# Altium PCB PCB.PcbDoc (part 2 of 2)
Units mil, origin at the board's own origin, x right, y up, seen from the top; angles counter-clockwise.
Board outline 6000 x 4000 mil, 2 copper layers (Top Layer, Bottom Layer); 149 components, 246 nets, 514 pads, 0 vias.
Unrouted connection lines stored in the file: 218.
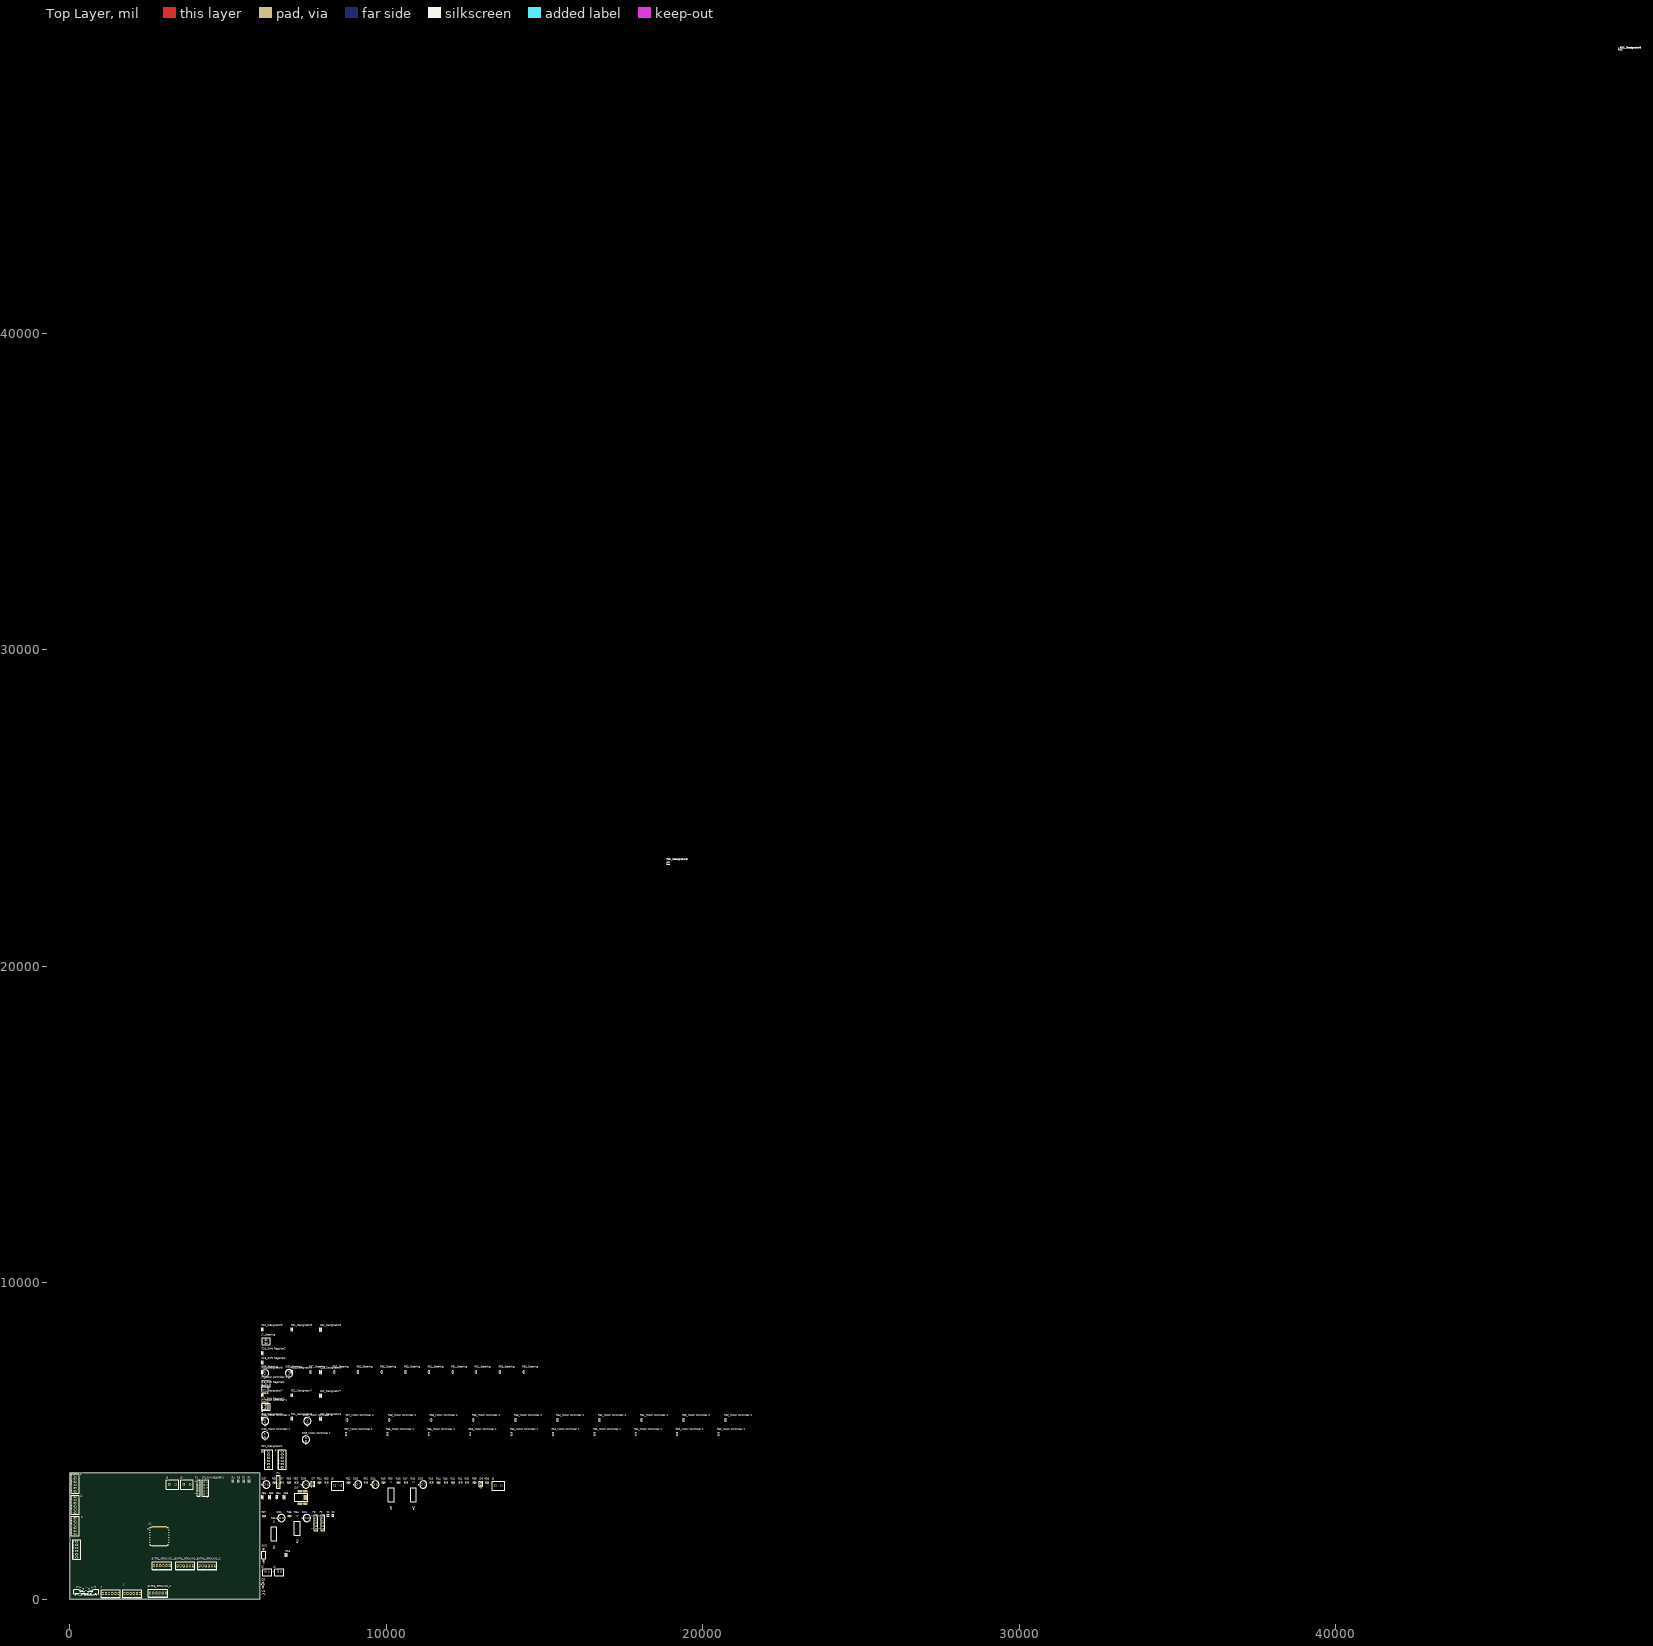
[diagram p0: Top Layer view]

## Nets (pads, with @x,y where several pads share a name; then routed paths per layer and width w, separated by ;. In a path a pad name is that pad's centre, name@x,y a point inside that pad or via, vN(x,y) a via of type N, cw(c..) or ccw(c..) an arc to the next point about the centre after c; other vN are vias at no path point)
5-3_1: U1.29
5-3_2: U1.30
5-3_3: U1.31
5-3_4: U1.32
5-3_5: U1.33
5-3_6: U1.34
5V_CLOCK: "U3_Shift Register1.11" U1.1
5V_DATA: "U3_Shift Register1.14" U1.5
5V_FAULT: R18.1 U1.80
5V_LATCH: "U3_Shift Register1.12" U1.3
12-3_1: U1.15
12-3_2: U1.16
12-3_3: U1.36
12-3_4: U1.18
12-3_5: U1.26
12-3_6: U1.25
12V_CLOCK: "U3_Shift Register2.11" U1.78
12V_DATA: "U3_Shift Register2.14" U1.35
12V_LATCH: "U3_Shift Register2.12" U1.77
AC_CS: U1.82 U5.5
AC_INT: U1.79 U5.6
AC_SCL: U1.84 U5.2
AC_SDI: U1.54 U5.3
AC_SDO: U1.17 U5.4
BOOT: 
BOOT0: 
BOOT1: 
CAN1_N: J3.1 J3.2 J4.1 J4.2
CAN1_RX: U1.70
CAN1_STBY: U1.69
CAN1_TX: U1.71
CAN2_RX: U1.51
CAN2_STBY: U1.53
CAN2_TX: U1.52
COMP: 
EX_PIN_1: 5.1 U1.67
EX_PIN_2: P3.5 U1.81
EX_PIN_3: P3.4 U1.83
EX_PIN_4: P3.3 U1.85
EX_PIN_5: P3.2 U1.60
EX_PIN_6: P3.1 U1.97
EX_PIN_7: P2.5 U1.98
EX_PIN_8: P2.4 U1.2
EX_PIN_9: P2.3 U1.4
EX_PIN_10: P2.2 U1.40
EX_PIN_11: P2.1 U1.41
GND: 1.1 1.2 1.3 1.4 1.5 1.6 2.1 2.2 2.3 2.4 2.5 2.6 "C18_Shift Register1.2" "C18_Shift Register2.2" "DS8_Motor Controller 1.2" "DS8_Motor Controller 2.2" "DS9_Motor Controller 1.2" "DS9_Motor Controller 2.2" "J7_Motor Controller 1.2" "J7_Motor Controller 2.2" "U3_Shift Register1.8" "U3_Shift Register1.13" "U3_Shift Register2.8" "U3_Shift Register2.13" C1.2 C2.2 C22_Designator1.2 C22_Designator2.2 C22_Designator3.2 C22_Designator4.2 C22_Designator5.2 C22_Designator6.2 C22_Designator7.2 C22_Designator8.2 C22_Designator9.2 C53.2 C54.1 C55.1 C56.1 D5.2 D6.2 D7.2 DS1.2 DS2.2 DS3.2 DS4.2 DS5.2 DS6.2 DS7.2 DS8_Steering.2 DS9_Steering.2 EXTRA_GROUND_1.1 EXTRA_GROUND_1.2 EXTRA_GROUND_1.3 EXTRA_GROUND_1.4 EXTRA_GROUND_1.5 EXTRA_GROUND_1.6 EXTRA_GROUND_2.1 EXTRA_GROUND_2.2 EXTRA_GROUND_2.3 EXTRA_GROUND_2.4 EXTRA_GROUND_2.5 EXTRA_GROUND_2.6 EXTRA_GROUND_3.1 EXTRA_GROUND_3.2 EXTRA_GROUND_3.3 EXTRA_GROUND_3.4 EXTRA_GROUND_3.5 EXTRA_GROUND_3.6 EXTRA_GROUND_4.1 EXTRA_GROUND_4.2 EXTRA_GROUND_4.3 EXTRA_GROUND_4.4 EXTRA_GROUND_4.5 EXTRA_GROUND_4.6 J5.1 J6.1 J7_Steering.2 J10.5 J10.6 J10.7 J10.8 J10.9 P1.5 P4.1 R31_Designator1.1 R31_Designator2.1 R31_Designator3.1 R31_Designator4.1 R31_Designator5.1 R31_Designator6.1 STLINK-HEADER-1.3 STLINK-HEADER-1.8 SW1.2 U1.10 U1.20 U1.27 U1.49 U1.74 U1.99 U5.8 U5.13
MC1_ENABLE: U1.44
MC2_ENABLE: U1.45
Net3_1: 3.1
Net3_2: 3.2
Net3_3: 3.3
Net3_4: 3.4
Net3_5: 3.5
Net3_6: 3.6
Net4_1: 4.1
Net4_2: 4.2
Net4_3: 4.3
Net4_4: 4.4
Net4_5: 4.5
Net4_6: 4.6
Net5_2: 5.2 U1.9
Net5_3: 5.3 U1.8
Net5_4: 5.4 U1.7
Net5_5: 5.5 U1.64
Net5_6: 5.6 U1.63
Net6_1: 6.1 U1.88
Net6_2: 6.2 U1.55
Net6_3: 6.3 U1.56
Net6_4: 6.4 U1.57
Net6_5: 6.5 U1.58
Net6_6: 6.6 U1.59
Net12_LOAD_SWITCH_Designator1_2: "U3_Shift Register2.5"
Net12_LOAD_SWITCH_Designator1_5: R22_Designator1.2
Net12_LOAD_SWITCH_Designator1_6: R21_Designator1.1
Net12_LOAD_SWITCH_Designator1_7: C22_Designator1.1 J2.6 R22_Designator1.1
Net12_LOAD_SWITCH_Designator2_2: "U3_Shift Register2.4"
Net12_LOAD_SWITCH_Designator2_5: R22_Designator2.2
Net12_LOAD_SWITCH_Designator2_6: R21_Designator2.1
Net12_LOAD_SWITCH_Designator2_7: C22_Designator2.1 J2.5 R22_Designator2.1
Net12_LOAD_SWITCH_Designator3_2: "U3_Shift Register2.3"
Net12_LOAD_SWITCH_Designator3_5: R22_Designator3.2
Net12_LOAD_SWITCH_Designator3_6: R21_Designator3.1
Net12_LOAD_SWITCH_Designator3_7: C22_Designator3.1 J2.4 R22_Designator3.1
Net12_LOAD_SWITCH_Designator4_2: "U3_Shift Register2.2"
Net12_LOAD_SWITCH_Designator4_5: R22_Designator4.2
Net12_LOAD_SWITCH_Designator4_6: R21_Designator4.1
Net12_LOAD_SWITCH_Designator4_7: C22_Designator4.1 J2.3 R22_Designator4.1
Net12_LOAD_SWITCH_Designator5_2: "U3_Shift Register2.1"
Net12_LOAD_SWITCH_Designator5_5: R22_Designator5.2
Net12_LOAD_SWITCH_Designator5_6: R21_Designator5.1
Net12_LOAD_SWITCH_Designator5_7: C22_Designator5.1 J2.2 R22_Designator5.1
Net12_LOAD_SWITCH_Designator6_2: "U3_Shift Register2.15"
Net12_LOAD_SWITCH_Designator6_5: R22_Designator6.2
Net12_LOAD_SWITCH_Designator6_6: R21_Designator6.1
Net12_LOAD_SWITCH_Designator6_7: C22_Designator6.1 J2.1 R22_Designator6.1
Net12_LOAD_SWITCH_Designator7_5: R22_Designator7.2
Net12_LOAD_SWITCH_Designator7_6: R21_Designator7.1
Net12_LOAD_SWITCH_Designator7_7: "J7_Motor Controller 1.1" "R59_Motor Controller 1.2" C22_Designator7.1 R22_Designator7.1
Net12_LOAD_SWITCH_Designator8_5: R22_Designator8.2
Net12_LOAD_SWITCH_Designator8_6: R21_Designator8.1
Net12_LOAD_SWITCH_Designator8_7: "J7_Motor Controller 2.1" "R59_Motor Controller 2.2" C22_Designator8.1 R22_Designator8.1
Net12_LOAD_SWITCH_Designator9_5: R22_Designator9.2
Net12_LOAD_SWITCH_Designator9_6: R21_Designator9.1
Net12_LOAD_SWITCH_Designator9_7: C22_Designator9.1 J7_Steering.1 R22_Designator9.1 R59_Steering.2
NetC1_1: C1.1 U1.48
NetC2_1: C2.1 U1.73
NetC3_1: U1.12
NetC4_1: U1.13
NetC20_5VLS1_2: J1.1
NetC20_5VLS2_2: J1.2
NetC20_5VLS3_2: J1.3
NetC20_5VLS4_2: J1.4
NetC20_5VLS5_2: J1.5
NetC20_5VLS6_2: J1.6
NetC32_2: 
NetC34_2: 
NetC53_1: C53.1 U5.14
NetD1_A: 
NetD2_K: 
NetD3_K: 
NetD4_K: 
NetDS1_1: DS1.1 R34.1
NetDS2_1: DS2.1 R36.1
NetDS3_1: DS3.1 R42.1
NetDS4_1: DS4.1 R48.1
NetDS5_1: DS5.1 R50.1
NetDS6_1: DS6.1 R53.1
NetDS7_1: DS7.1 R58.1
"NetDS8_Motor Controller 1_1": "DS8_Motor Controller 1.1" "R67_Motor Controller 1.1"
"NetDS8_Motor Controller 2_1": "DS8_Motor Controller 2.1" "R67_Motor Controller 2.1"
NetDS8_Steering_1: DS8_Steering.1 R67_Steering.1
"NetDS9_Motor Controller 1_1": "DS9_Motor Controller 1.1" "R68_Motor Controller 1.1"
"NetDS9_Motor Controller 2_1": "DS9_Motor Controller 2.1" "R68_Motor Controller 2.1"
NetDS9_Steering_1: DS9_Steering.1 R68_Steering.1
NetIC1_5VLS1_3: "U3_Shift Register1.15"
NetIC1_5VLS1_5: 
NetIC1_5VLS2_3: "U3_Shift Register1.1"
NetIC1_5VLS2_5: 
NetIC1_5VLS3_3: "U3_Shift Register1.2"
NetIC1_5VLS3_5: 
NetIC1_5VLS4_3: "U3_Shift Register1.3"
NetIC1_5VLS4_5: 
NetIC1_5VLS5_3: "U3_Shift Register1.4"
NetIC1_5VLS5_5: 
NetIC1_5VLS6_3: "U3_Shift Register1.5"
NetIC1_5VLS6_5: 
NetJ8_1: J8.1 U1.86
NetJ8_2: J8.2 U1.87
NetJ9_1: J9.1 U1.23
NetJ9_2: J9.2 U1.24
NetJ10_1: J10.1
NetJ10_4: J10.4
NetP1_1: P1.1 U1.38
NetP1_2: P1.2 U1.39
NetP1_3: P1.3 U1.65
NetP1_4: P1.4 U1.66
NetR1_2: R1.2 STLINK-HEADER-1.2 U1.72
NetR2_2: R2.2 STLINK-HEADER-1.1 U1.76
NetR3_2: R3.2 U1.93
NetR4_2: R4.2 U1.92
NetR5_2: U1.94
NetR6_1: 
NetR12_2: 
NetR13_2: 
NetR28_CAN1_2: 
NetR28_CAN2_2: 
NetR30_Designator1_1: R31_Designator1.2
NetR30_Designator2_1: R31_Designator2.2
NetR30_Designator3_1: R31_Designator3.2
NetR30_Designator4_1: R31_Designator4.2
NetR30_Designator5_1: R31_Designator5.2
NetR30_Designator6_1: R31_Designator6.2
NetR34_2: R34.2 R35.1
NetR35_2: R35.2 U1.61
NetR36_2: R36.2 R37.1
NetR37_2: R37.2 U1.62
NetR38_1: R38.1 R39.2
NetR39_1: R39.1 R40.2
NetR40_1: R40.1 R41.2
NetR41_1: R41.1 R42.2
NetR43_1: R43.1 R46.2
NetR44_1: R44.1 R47.2
NetR45_1: R45.1 R48.2
NetR46_1: R46.1 R49.2
NetR47_1: R47.1 R50.2
NetR49_1: R49.1 R51.2
NetR51_1: R51.1 R52.2
NetR52_1: R52.1 R53.2
NetR54_1: R54.1 R55.2
NetR55_1: R55.1 R56.2
NetR56_1: R56.1 R57.2
NetR57_1: R57.1 R58.2
"NetR59_Motor Controller 1_1": "R59_Motor Controller 1.1" "R61_Motor Controller 1.2"
"NetR59_Motor Controller 2_1": "R59_Motor Controller 2.1" "R61_Motor Controller 2.2"
NetR59_Steering_1: R59_Steering.1 R61_Steering.2
"NetR60_Motor Controller 1_1": "R60_Motor Controller 1.1" "R62_Motor Controller 1.2"
"NetR60_Motor Controller 2_1": "R60_Motor Controller 2.1" "R62_Motor Controller 2.2"
NetR60_Steering_1: R60_Steering.1 R62_Steering.2
"NetR61_Motor Controller 1_1": "R61_Motor Controller 1.1" "R63_Motor Controller 1.2"
"NetR61_Motor Controller 2_1": "R61_Motor Controller 2.1" "R63_Motor Controller 2.2"
NetR61_Steering_1: R61_Steering.1 R63_Steering.2
"NetR62_Motor Controller 1_1": "R62_Motor Controller 1.1" "R64_Motor Controller 1.2"
"NetR62_Motor Controller 2_1": "R62_Motor Controller 2.1" "R64_Motor Controller 2.2"
NetR62_Steering_1: R62_Steering.1 R64_Steering.2
"NetR63_Motor Controller 1_1": "R63_Motor Controller 1.1" "R65_Motor Controller 1.2"
"NetR63_Motor Controller 2_1": "R63_Motor Controller 2.1" "R65_Motor Controller 2.2"
NetR63_Steering_1: R63_Steering.1 R65_Steering.2
"NetR64_Motor Controller 1_1": "R64_Motor Controller 1.1" "R66_Motor Controller 1.2"
"NetR64_Motor Controller 2_1": "R64_Motor Controller 2.1" "R66_Motor Controller 2.2"
NetR64_Steering_1: R64_Steering.1 R66_Steering.2
"NetR65_Motor Controller 1_1": "R65_Motor Controller 1.1" "R67_Motor Controller 1.2"
"NetR65_Motor Controller 2_1": "R65_Motor Controller 2.1" "R67_Motor Controller 2.2"
NetR65_Steering_1: R65_Steering.1 R67_Steering.2
"NetR66_Motor Controller 1_1": "R66_Motor Controller 1.1" "R68_Motor Controller 1.2"
"NetR66_Motor Controller 2_1": "R66_Motor Controller 2.1" "R68_Motor Controller 2.2"
NetR66_Steering_1: R66_Steering.1 R68_Steering.2
"NetU3_Shift Register1_6": "U3_Shift Register1.6"
"NetU3_Shift Register1_7": "U3_Shift Register1.7"
"NetU3_Shift Register1_9": "U3_Shift Register1.9"
"NetU3_Shift Register2_6": "U3_Shift Register2.6"
"NetU3_Shift Register2_7": "U3_Shift Register2.7"
"NetU3_Shift Register2_9": "U3_Shift Register2.9"
NRST_n: U1.14
OSC_IN: 
OSC_OUT: 
PH: D5.1
RST: SW1.1
ST_JTCK: P4.4
ST_JTMS: P4.3
STEERING_ENABLE: U1.46
STLINK_LED: 
SW_EN: 
T_JTCK: R2.1
T_JTMS: R1.1
T_SWDIO_IN: 
UART_RX: R4.1
UART_TX: R3.1
USB_5V: 
USB_D_N: J10.2
USB_D_P: J10.3
VCC3V3: C54.2 C55.2 C56.2 P4.2 R21_Designator1.2 R21_Designator2.2 R21_Designator3.2 R21_Designator4.2 R21_Designator5.2 R21_Designator6.2 R21_Designator7.2 R21_Designator8.2 R21_Designator9.2 R45.2 U1.6 U1.11 U1.19 U1.21 U1.22 U1.28 U1.50 U1.75 U1.100 U5.1 U5.16
VCC3V3DEBUG: 
VCC5V: "C18_Shift Register1.1" "C18_Shift Register2.1" "U3_Shift Register1.10" "U3_Shift Register1.16" "U3_Shift Register2.10" "U3_Shift Register2.16" R44.2
VCC12V: "R60_Motor Controller 1.2" "R60_Motor Controller 2.2" D6.1 D7.1 J5.2 J6.2 R18.2 R38.2 R43.2 R54.2 R60_Steering.2
VSENSE: 
pads on no net: J10.X J10.Y STLINK-HEADER-1.4 STLINK-HEADER-1.5 STLINK-HEADER-1.6 STLINK-HEADER-1.7 STLINK-HEADER-1.9 STLINK-HEADER-1.10 U1.37 U1.42 U1.43 U1.47 U1.68 U1.89 U1.90 U1.91 U1.95 U1.96 U5.7 U5.9 U5.10 U5.11 U5.12 U5.15

## Polygon pours and split planes (outlines as drawn)
GND on Bottom Layer "GND_L02_P000" (solid, pour order 0): -370,4525 -970,3925 -970,-770 6685,-770 6990,-465 6990,4360

## Silkscreen, mask and mechanical layers (free items; w line width, h text height)
Top Overlay:
  drawing of 13 lines, arcs and shapes, not listed

## Text inside footprints (layer, text, board x,y; h text height)
P1: Top Overlay "1" at 4003.07,3310.28 h40 r90; Top Overlay "5" at 4003.07,3700.04 h40 r90
P2: Top Overlay "1" at 7928.07,2215.28 h40 r90; Top Overlay "5" at 7928.07,2605.04 h40 r90
P3: Top Overlay "1" at 7708.07,2215.28 h40 r90; Top Overlay "5" at 7708.07,2605.04 h40 r90